# Allegro board unnamed.brd
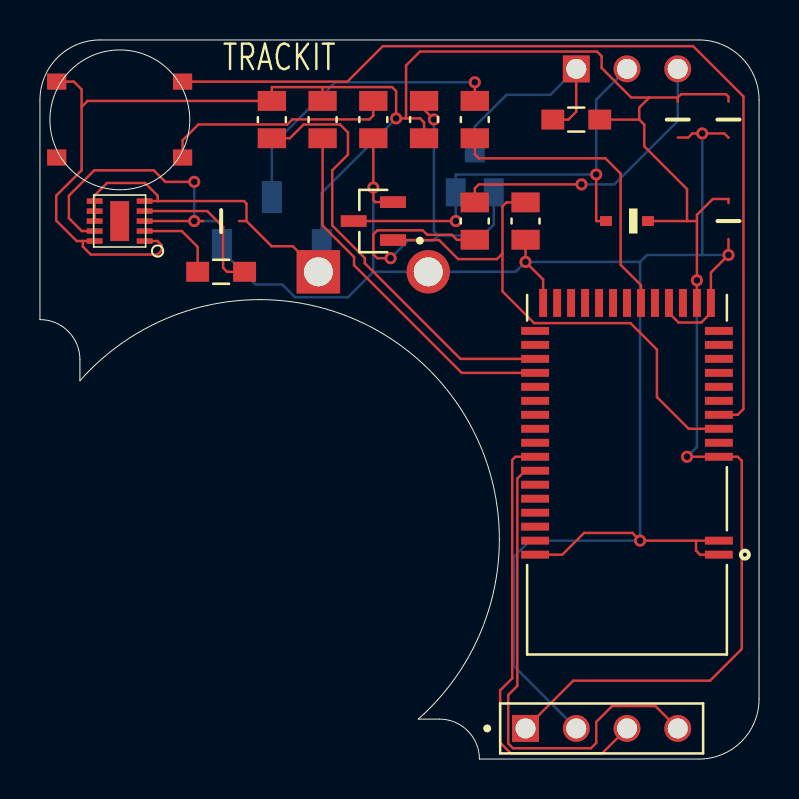
[diagram p0: board, top side]
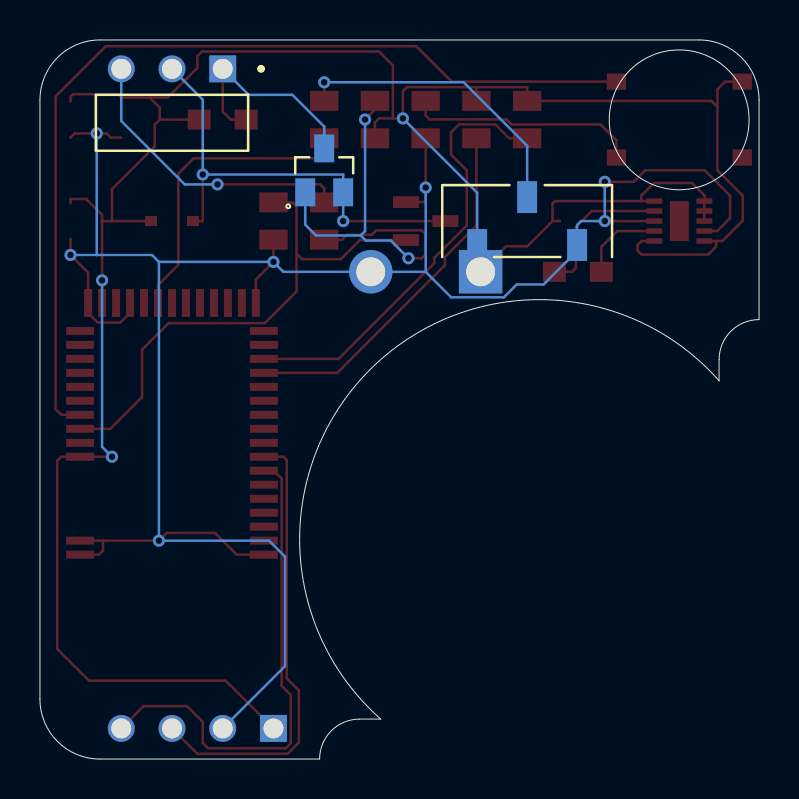
[diagram p1: board, bottom side, seen from below]

Outline 36 x 36 mm; copper layers: TOP, BOTTOM. Coordinates in mm from the lower left corner of the outline.
Outline path: circle c4,32 r3.5 ; 0,33 0,22 arc(1.41,21.41) 2,20 2,18.94 arc(19.49,19.49) 18.94,2 20,2 arc(21.41,1.41) 22,0 33,0 arc(35.12,0.88) 36,3 36,33 arc(35.12,35.12) 33,36 3,36 arc(0.88,35.12) 0,33

## Placement (name value [footprint] x y rotation side)
C1  1uF  [CAPC2012X140N]  34.47 26.93 270 top
C2  4.7uF  [CAPC2012X140N]  9.07 26.93 0 top
C3  10uF  [CAPC2012X140N]  34.47 32.01 90 top
C4  1uF  [CAPC2012X140N]  31.93 32.01 90 top
D1  1N4148WSQ-7-F  [SOD2513X120N]  29.39 26.93 180 top
J1  0039296028  [MOLEX_0039296028]  16.69 24.39 90 top
J2  1987374-4  [TE_1987374-4]  24.31 1.53 0 top
J3  826948-3  [TE_826948-3]  26.85 34.55 0 bottom
L1  MLF2012K390KTD25  [INDC2012X87N]  9.07 24.39 0 top
L2  MLF2012K390KTD25  [INDC2012X87N]  26.85 32.01 0 top
Q1  WNM2016-3-TR  [SOT95P240X115-3N]  16.69 26.93 180 top
Q2  MMBT3904  [SOT95P240X120-3N]  21.77 29.47 180 bottom
R1  2K  [RESC2012X60N]  21.77 32.01 90 top
R2  100K  [RESC2012X60N]  11.61 32.01 90 top
R3  100K  [RESC2012X60N]  14.15 32.01 90 top
R4  1K  [RESC2012X60N]  16.69 32.01 270 top
R5  CR0805-FX-3002ELF  [RESC2012X60N]  19.23 32.01 270 top
R6  47K  [RESC2012X60N]  24.31 26.93 90 top
R7  CR0805-FX-3002ELF  [RESC2012X60N]  21.77 26.93 90 top
S1  JS102011JCQN  [SW_JS102011JCQN]  11.61 26.93 180 bottom
SW1  TL3342F160QG  [SW_TL3342F160QG]  3.99 32.01 0 top
U1  MDBT40-256RV3  [MODULE_MDBT40-256RV3]  29.39 14.23 180 top
U2  TPS63031  [10SON]  3.99 26.93 90 top

## Library data of the parts
C1-C4 = Cap- 0805
D1 = 1N4148WSQ-7-F
J1 = 2-pin Connector
J2 = 4 in Header
J3 = 3-pin Header
L1 L2 = Inductor
Q1 = N Channel MOSFET
Q2 = Transistor
R1-R7 = Resisitor - 0805
S1 = JS102011JCQN
SW1 = Push Button
U1 = Bluetooth
U2 = TPS63031

## Footprints (pads in the part's own frame, mm; a bottom-side part is the same pattern mirrored in y, then rotated)
10SON
  rect 0.28x0.8 smd: 1(-1,-1.25) 2(-0.5,-1.25) 3(0,-1.25) 4(0.5,-1.25) 5(1,-1.25) 6(1,1.25) 7(0.5,1.25) 8(0,1.25) 9(-0.5,1.25) 10(-1,1.25)
  rect 2x0.95 smd: EXP(0,0)
CAPC2012X140N
  rect 0.029x0.037 smd: 1(-0.9,0) 2(0.9,0)
INDC2012X87N
  rect 1.15x1 smd: 1(-1.175,0) 2(1.175,0)
MODULE_MDBT40-256RV3
  rect 1.4x0.4 smd: 1(-4.6,4) 2(-4.6,3.3) 3(-4.6,-0.9) 4(-4.6,-1.6) 5(-4.6,-2.3) 6(-4.6,-3) 7(-4.6,-3.7) 8(-4.6,-4.4) 9(-4.6,-5.1) 10(-4.6,-5.8) 11(-4.6,-6.5) 12(-4.6,-7.2) 26(4.6,-7.2) 27(4.6,-6.5) 28(4.6,-5.8) 29(4.6,-5.1) 30(4.6,-4.4) 31(4.6,-3.7) 32(4.6,-3) 33(4.6,-2.3) 34(4.6,-1.6) 35(4.6,-0.9) 36(4.6,-0.2) 37(4.6,0.5) 38(4.6,1.2) 39(4.6,1.9) 40(4.6,2.6) 41(4.6,3.3) 42(4.6,4)
  rect 0.4x1.4 smd: 13(-4.2,-8.6) 14(-3.5,-8.6) 15(-2.8,-8.6) 16(-2.1,-8.6) 17(-1.4,-8.6) 18(-0.7,-8.6) 19(0,-8.6) 20(0.7,-8.6) 21(1.4,-8.6) 22(2.1,-8.6) 23(2.8,-8.6) 24(3.5,-8.6) 25(4.2,-8.6)
MOLEX_0039296028
  rect 2.175x2.175 hole 1.45: 1(0,2.75)
  round 2.175 hole 1.45: 2(0,-2.75)
RESC2012X60N
  rect 1x1.42 smd: 1(-0.935,0) 2(0.935,0)
SOD2513X120N
  rect 0.6x0.5 smd: A(1.05,0) C(-1.05,0)
SOT95P240X115-3N
  rect 1.3x0.59 smd: 1(-0.985,0.95) 2(-0.985,-0.95) 3(0.985,0)
SOT95P240X120-3N
  rect 1x1.4 smd: 1(-0.95,-1.1) 2(0.95,-1.1) 3(0,1.1)
SW_JS102011JCQN
  rect 1x1.6 smd: 1(-2.5,-1.2) 2(0,1.2) 3(2.5,-1.2)
SW_TL3342F160QG
  rect 0.965x0.813 smd: 1(-3.15,-1.9) 2(3.15,-1.9) 3(-3.15,1.9) 4(3.15,1.9)
TE_826948-3
  rect 1.35x1.35 hole 1: 1(0,0)
  round 1.35 hole 1: 2(2.54,0) 3(5.08,0)
TE_1987374-4
  rect 1.35x1.35 hole 1: 1(0,0)
  round 1.35 hole 1: 2(2.54,0) 3(5.08,0) 4(7.62,0)

## Nets
3.3V: C1.1 C3.2 C4.2 D1.C J2.1 L2.2 R2.2 R3.2 R5.2 S1.1 SW1.3 U1.3(AVDD) U1.14(VDD) U2.1(VOUT) U2.10(FB)
GND_POWER: C1.2 C2.1 C3.1 C4.1 J1.2 J2.2 Q1.2(S) R4.2 R6.1 S1.3 U1.1(GND) U1.2(GND__1) U1.13(GND__2) U1.16(P0.30) U1.25(GND__3) U1.42(GND__4) U2.3(PGND) U2.9(GND)
BUTTON: SW1.4 U1.6(P0.23)
BUZZER: Q1.1(G) R6.2 U1.5(P0.22)
CTS_3V: R2.1 U1.28(P0.10)
DCC: U1.15(DCC)
DEC2: U1.41(DEC2)
MODE_3V: R1.1 U1.18(P0.01/AIN2)
RXD_3V: R3.1 U1.29(P0.11)
SWCLK: J2.4 U1.36(SWCLK)
SWDIO: J2.3 U1.35(SWDIO/RESET)
N00675: L1.2 U2.4(L1)
N00727: L1.1 U2.2(L2)
N00847: C2.2 J1.1 U2.5(VIN) U2.6(EN) U2.7(PS/SYNC) U2.8(VINA)
N03993: D1.A J3.2 Q1.3(D) Q2.2(E)
N13311: R1.2 S1.2
N15361: J3.1 L2.1 Q2.3(C)
N15436: Q2.1(B) R5.1 R7.1
N15440: J3.3 R7.2
N083160: R4.1 SW1.2

Pads without a net: SW1 1; U1 4 7 8 9 10 11 12 17 19 20 21 22 23 24 26 27 30 31 32 33 34 37 38 39 40; U2 EXP

## Via types
v1: diameter 0.61, hole 0.33, TOP to BOTTOM, 16 vias

## Routing (per net, layer and track width the routed paths; a pad name or vN(x,y) marks a point on that pad's centre or on a via; arc(x,y) is an arc through that point)
3.3V: length 118.4
  TOP w0.127: 18.33,32.07 v1(17.83,32.07) 17.83,33.44 17.63,33.64 14.15,33.64 ; 18.33,32.07 18.33,34.73 19.02,35.42 27.89,35.42 28.12,35.19 28.12,34.6 29.6,33.12 30.51,33.12 ; 18.33,32.07 19.03,32.07 19.23,31.87 R5.2 ; U1.14 v1(32.89,23.97) 32.89,26.93 ; 30.51,33.12 30,32.61 30,32.01 ; 30.51,33.12 31.93,33.12 ; J2.1 26.7,3.92 33.55,3.92 35.13,5.51 35.13,14.93 34.94,15.13 U1.3 v1(32.39,15.13) ; 30,32.01 30.26,31.76 30.26,30.67 32.39,28.53 32.39,26.93 ; 30,32.01 L2.2 ; 32.39,26.93 32.89,26.93 ; 32.39,26.93 D1.C ; 32.89,26.93 32.89,27.24 33.68,28.04 34.47,28.04 C1.1 ; U2.10 2.15,25.93 ; 2.15,25.93 1.84,25.93 0.81,26.96 0.81,28.2 2.08,29.47 2.08,32.65 ; 2.15,25.93 2.15,25.65 2.55,25.26 5.89,25.26 6.08,25.45 6.08,25.73 5.89,25.93 U2.1 ; 2.08,32.65 2.08,33.53 1.7,33.91 SW1.3 ; 2.08,32.65 2.38,32.95 R2.2 11.61,33.64 14.15,33.64 ; R3.2 14.15,33.64 ; C4.2 31.93,33.12 ; 31.93,33.12 32.09,33.28 34.34,33.28 34.47,33.16 C3.2
  BOTTOM w0.127: v1(17.83,32.07) 14.11,28.35 S1.1 ; v1(32.89,23.97) 32.89,15.63 v1(32.39,15.13)
GND_POWER: length 114.3
  TOP w0.127: C4.1 32.45,31.11 32.66,31.32 v1(33.16,31.32) 34.26,31.32 34.47,31.11 C3.1 ; U1.2 32.85,10.93 ; 32.85,10.93 32.85,10.43 33.04,10.23 U1.1 ; 32.85,10.93 v1(30.04,10.93) 29.66,11.32 27.24,11.32 26.15,10.23 U1.42 ; Q1.2 16.79,27.88 16.69,27.98 v1(16.69,28.61) R4.2 ; C1.2 v1(34.47,25.24) 33.59,24.36 U1.13 33.59,22.33 33.11,21.85 31.97,21.85 31.49,22.33 U1.16 ; U2.9 2.09,26.43 1.45,27.08 1.45,28.2 2.72,29.47 5.7,29.47 6.28,28.9 v1(7.72,28.9) ; U1.25 25.19,24.01 v1(24.31,24.89) R6.1 ; U2.3 v1(7.72,26.93) C2.1
  BOTTOM w0.127: 33.16,25.24 v1(33.16,31.32) ; 33.16,25.24 v1(34.47,25.24) ; 33.16,25.24 30.39,25.24 30.04,24.89 ; 30.04,24.89 v1(24.31,24.89) 23.81,24.39 J1.2 16.69,24.39 ; 30.04,24.89 v1(30.04,10.93) 24.53,10.93 23.74,10.14 23.74,4.65 J2.2 ; v1(7.72,28.9) v1(7.72,26.93) 8.91,26.93 9.11,26.73 S1.3 9.11,25.43 10.78,23.76 12.13,23.76 12.77,23.12 15.41,23.12 16.69,24.39 ; 16.69,24.39 v1(16.69,28.61)
BUTTON: length 46.9
  TOP w0.127: U1.6 34.93,17.23 35.22,17.52 35.22,33.17 32.7,35.69 17.16,35.69 15.39,33.91 SW1.4
BUZZER: length 26.6
  TOP w0.127: 23.16,25.31 23.16,27.67 23.35,27.87 R6.2 ; 23.16,25.31 23.16,23.41 24.74,21.82 29.56,21.82 30.89,20.5 30.89,18.12 32.48,16.53 U1.5 ; 23.16,25.31 22.88,25.03 20.94,25.03 19.98,25.98 Q1.1
CTS_3V: length 22.3
  TOP w0.127: R2.1 12.51,31.08 13.2,31.77 15.02,31.77 15.42,31.37 15.42,30.26 14.63,29.47 14.63,26.71 16.26,25.08 16.26,24.82 21.05,20.03 U1.28
MODE_3V: length 15.4
  TOP w0.127: R1.1 21.77,30.27 21.97,30.07 28.31,30.07 29.07,29.31 29.07,24.74 30.09,23.72 U1.18
RXD_3V: length 18.3
  TOP w0.127: R3.1 14.15,26.71 15.73,25.13 15.73,24.72 21.11,19.33 U1.29
SWCLK: length 25
  TOP w0.127: U1.36 24.29,14.43 23.9,14.04 23.9,3.66 23.44,3.21 23.44,0.78 23.68,0.54 27.59,0.54 27.85,0.8 27.85,1.86 28.64,2.65 30.81,2.65 J2.4
SWDIO: length 22.7
  TOP w0.127: J2.3 28.12,0.26 23.6,0.26 23.04,0.82 23.04,3.44 23.65,4.04 23.65,14.98 23.8,15.13 U1.35
N00675: length 7.5
  TOP w0.127: U2.4 8.37,27.43 9.17,26.64 9.17,24.59 9.37,24.39 L1.2
N00727: length 4.2
  TOP w0.127: U2.2 7.1,26.43 7.89,25.64 L1.1
N00847: length 16.3
  TOP w0.127: J1.1 12.66,25.67 11.6,25.67 10.34,26.93 ; 5.89,27.93 5.89,28.2 5.26,28.84 3.35,28.84 2.72,28.2 2.72,27.91 ; 5.89,27.93 U2.5 ; 5.89,27.93 10.21,27.93 10.34,27.81 10.34,26.93 ; 10.34,26.93 C2.2 ; 2.72,27.91 2.74,27.89 U2.7 U2.8 ; 2.72,27.91 U2.6
N03993: length 23.2
  TOP w0.127: D1.A 27.85,26.93 v1(27.85,29.26) ; Q1.3 v1(20.82,26.93)
  BOTTOM w0.127: v1(20.82,26.93) Q2.2 20.82,29.26 v1(27.85,29.26) 27.85,33.01 J3.2
N13311: length 15
  TOP w0.127: R1.2 v1(21.77,33.88)
  BOTTOM w0.127: v1(21.77,33.88) 14.78,33.88 11.61,30.71 S1.2
N15361: length 10.8
  TOP w0.127: J3.1 26.85,32.41 26.45,32.01 L2.1
  BOTTOM w0.127: Q2.3 21.77,31.66 23.36,33.25 25.55,33.25 J3.1
N15436: length 21.8
  TOP w0.127: v1(19.72,32.02) 19.23,32.51 R5.1 ; R7.1 20.87,26 20.62,26.24 19.39,26.24 19.16,26.47 16.89,26.47 16.69,26.27 16.69,25.27 16.89,25.07 v1(17.55,25.07)
  BOTTOM w0.127: 19.94,26.21 22.18,26.21 22.72,26.75 Q2.1 ; 19.94,26.21 19.72,26.43 v1(19.72,32.02) ; 19.94,26.21 19.69,25.96 18.44,25.96 v1(17.55,25.07)
N15440: length 14.9
  TOP w0.127: R7.2 21.77,28.57 21.97,28.77 v1(27.11,28.77)
  BOTTOM w0.127: J3.3 31.93,31.94 28.75,28.77 v1(27.11,28.77)
N083160: length 11.7
  TOP w0.127: R4.1 16.69,32.22 16.49,32.02 12.64,32.02 12.38,31.77 7.93,31.77 7.14,30.98 SW1.2

## Text on the board
Ref Des/Silkscreen Top: TRACKIT
